# Altium PCB MotorBoard.PcbDoc (part 2 of 3)
Units mm, origin at the board's own origin, x right, y up, seen from the top; angles counter-clockwise.
Board outline 65.2 x 61.84 mm, 4 copper layers (Top Layer, Layer 1, Layer 2, Bottom Layer), stack 1.57 mm thick; 121 components, 73 nets, 432 pads, 165 vias.
Unrouted connection lines stored in the file: 1.
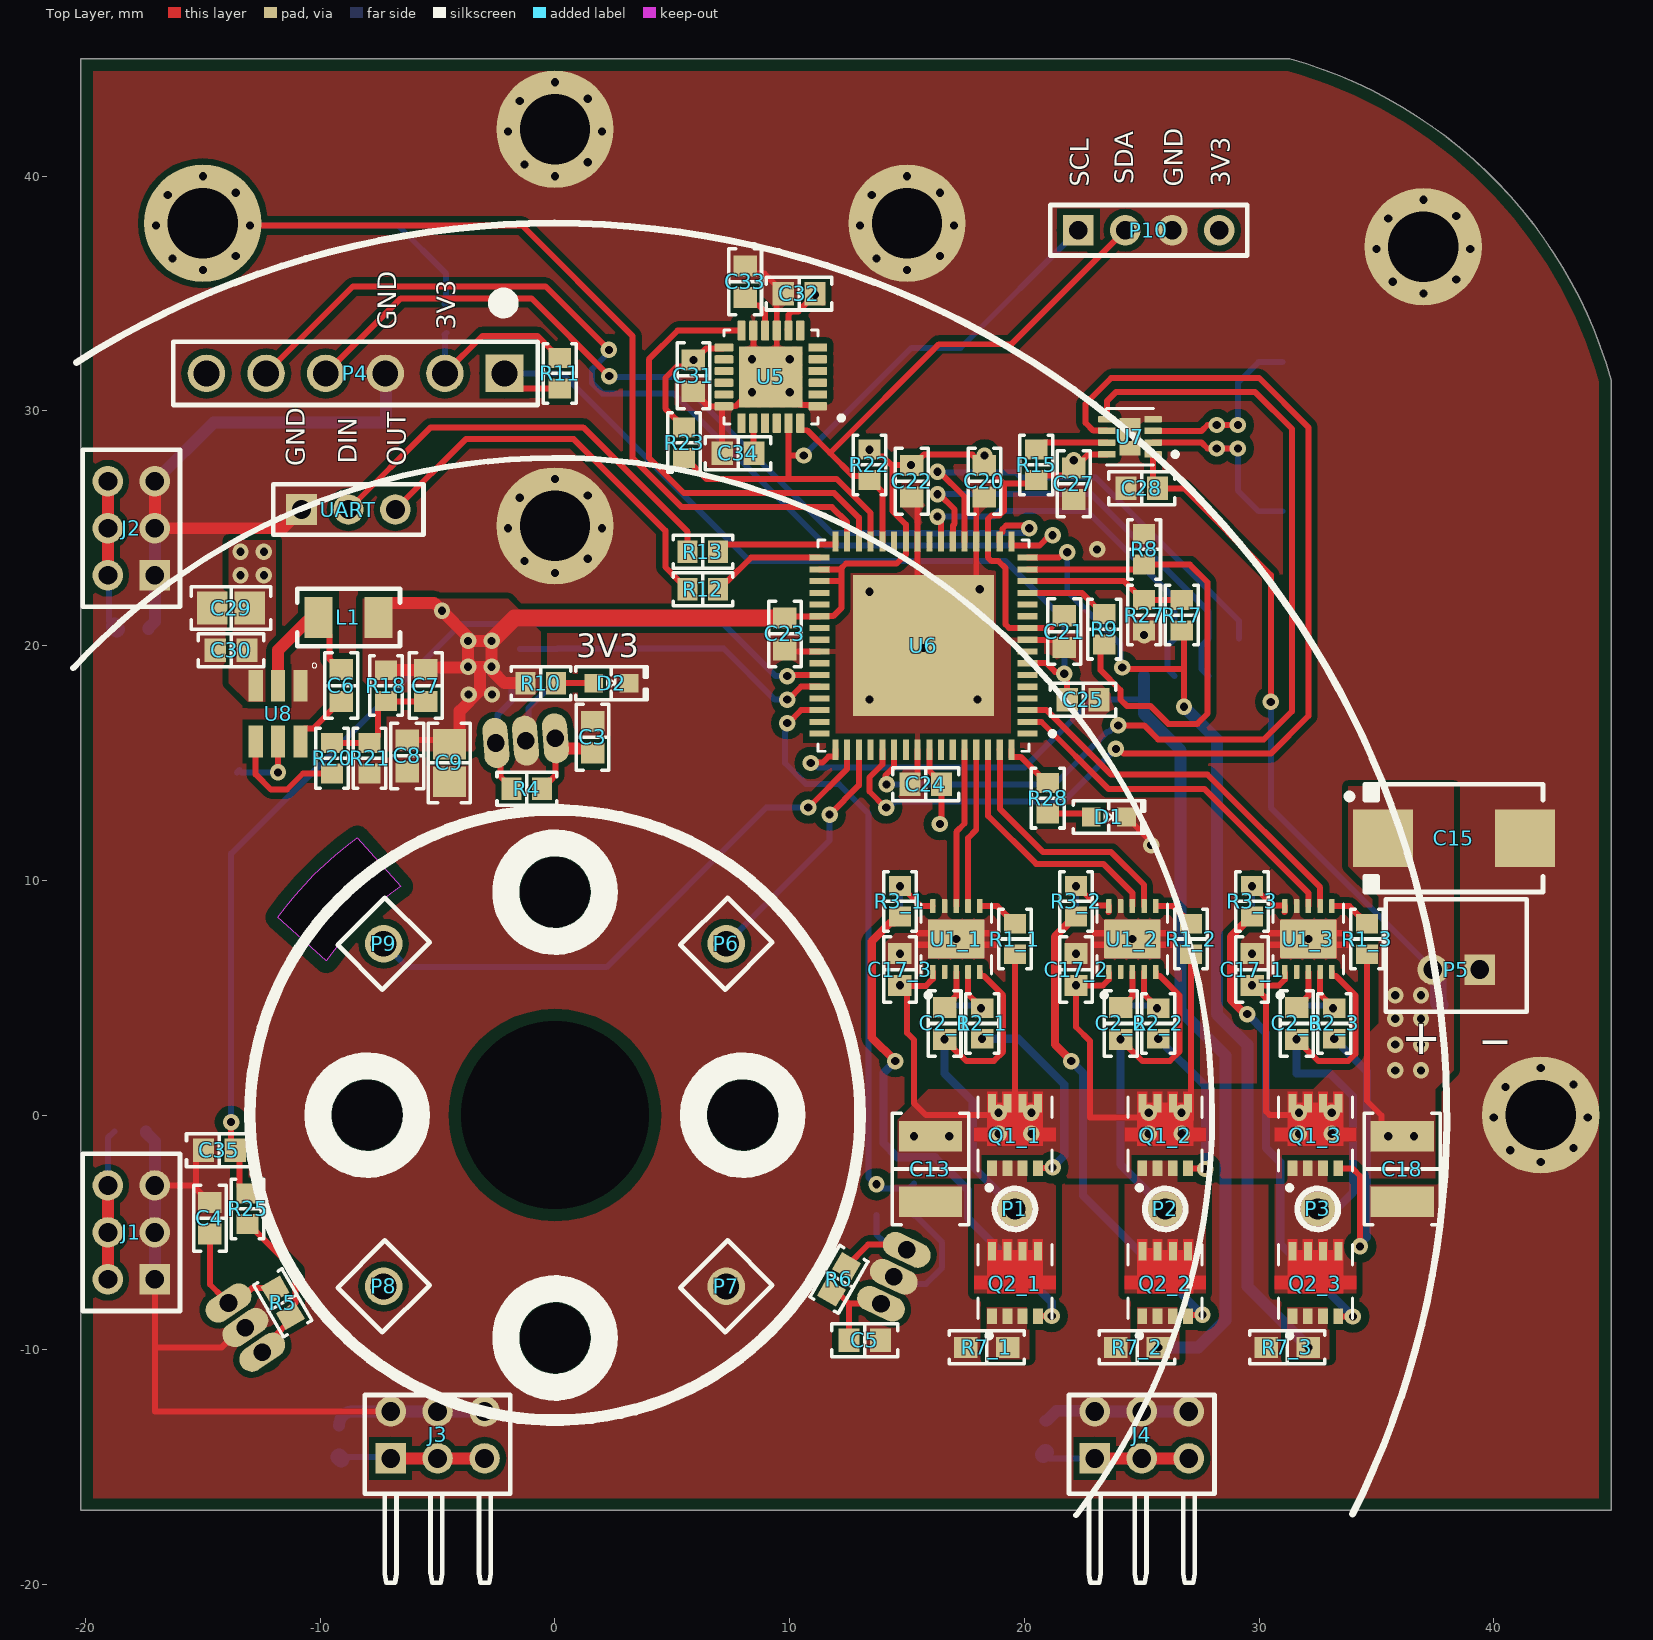
[diagram p0: Top Layer view]

## Part data (continued)
R21: library part RG1608P-133-B-T5, "RES SMD 13K OHM 0.1% 1/10W 0603", Device Package="0603 (1608 Metric)", Manufacturer=Susumu, Operating Temperature="-55°C ~ 155°C", Power (Watts)="0.1W, 1/10W", Ratings=AEC-Q200, Supplier Device Package=0603, Supplier Part Number 1=RG16P13.0KBCT-ND, Temperature Coefficient=±25ppm/°C, Tolerance=±0.1%, ComponentLink1Description=Datasheet, ComponentLink1URL=//media.digikey.com/pdf/Data%20Sheets/Susumu%20PDFs/RG_RM_RGH_Oct2012.pdf, ComponentLink2Description="DigiKey Link", ComponentLink2URL=http://digikey.com/product-detail/en/susumu/RG1608P-133-B-T5/RG16P13.0KBCT-ND/1240863, Composition="Thin Film", Features="Anti-Sulfur, Automotive AEC-Q200", Height - Seated (Max)="0.020\" (0.50mm)", LastUpdated="13-Aug-20 10:37:00 AM", Lifecycle Status=Active, Minimum Order=1, Number of Terminations=2, Package / Case="0603 (1608 Metric)", Packaging=TapeAndReel, Part Number=RG1608P-133-B-T5, Part Status=Active, PartId=12110, Price=0.06, Resistance="13 kOhms", Series=RG, Size / Dimension="0.063\" L x 0.031\" W (1.60mm x 0.80mm)", Supplier 1=DigiKey
R22 R23: library part CPF-A-0603B4K7E, "RES SMD 4.7K OHM 0.1% 1/16W 0603", Device Package="0603 (1608 Metric)", Manufacturer="TE Connectivity Passive Product", Operating Temperature="-55°C ~ 155°C", Power (Watts)="0.063W, 1/16W", Ratings=AEC-Q200, Supplier Device Package=0603, Supplier Part Number 1=A124067CT-ND, Temperature Coefficient=±25ppm/°C, Tolerance=±0.1%, ComponentLink1Description=Datasheet, ComponentLink1URL=https://www.te.com/commerce/DocumentDelivery/DDEController?Action=srchrtrv&DocNm=1773200-1&DocType=DS&DocLang=English, ComponentLink2Description="DigiKey Link", ComponentLink2URL=http://digikey.com/product-detail/en/te-connectivity-passive-product/CPF-A-0603B4K7E/A124067CT-ND/5969987, Composition="Thin Film", Features="Anti-Sulfur, Automotive AEC-Q200, Moisture Resistant", Height - Seated (Max)="0.022\" (0.55mm)", LastUpdated="13-Aug-20 10:37:07 AM", Lifecycle Status=Active, Minimum Order=1, Number of Terminations=2, Package / Case="0603 (1608 Metric)", Packaging=TapeAndReel, Part Number=CPF-A-0603B4K7E, Part Status=Active, PartId=8242, Price=0.09, Resistance="4.7 kOhms", Series="CPF-A, Neohm", Size / Dimension="0.061\" L x 0.031\" W (1.55mm x 0.80mm)", Supplier 1=DigiKey
R24 R25 R26: library part SDR03EZPJ221, "RES SMD 220 OHM 5% 0.3W 0603", Device Package="0603 (1608 Metric)", Manufacturer="Rohm Semiconductor", Operating Temperature="-55°C ~ 155°C", Power (Watts)=0.3W, Supplier Device Package=0603, Supplier Part Number 1=511-1752-1-ND, Temperature Coefficient=±200ppm/°C, Tolerance=±5%, ComponentLink1Description=Datasheet, ComponentLink1URL=https://www.rohm.com/datasheet/SDR03EZPJ/sdr-e, ComponentLink2Description="DigiKey Link", ComponentLink2URL=http://digikey.com/product-detail/en/rohm-semiconductor/SDR03EZPJ221/511-1752-1-ND/9675103, Composition="Thick Film", Features="Pulse Withstanding", Height - Seated (Max)="0.022\" (0.55mm)", LastUpdated="13-Aug-20 10:37:09 AM", Lifecycle Status=Active, Minimum Order=1, Number of Terminations=2, Package / Case="0603 (1608 Metric)", Packaging=TapeAndReel, Part Number=SDR03EZPJ221, Part Status=Active, PartId=6903, Price=0.01, Resistance="220 Ohms", Series=SDR03, Size / Dimension="0.063\" L x 0.031\" W (1.60mm x 0.80mm)", Supplier 1=DigiKey
U1_1 U1_2 U1_3: library part UCC27282DRCR, "3-A, 120-V half bridge gate driver with 5-V UVLO, interlock and enable 10-VSON -40 to 125", Package="VSON-10 Texas Instruments", Availability=Warning, DigiKey-Purchase-URL=https://snapeda.com/shop?store=DigiKey&id=3625400, MF="Texas Instruments", MP=UCC27282DRCR, Price=None, SnapEDA_Link=https://www.snapeda.com/parts/UCC27282DRCR/Texas%20Instruments/view-part/3625400/?ref=snap, Texas_Instruments-Purchase-URL=https://snapeda.com/shop?store=Texas+Instruments&id=3625400
U2 U3 U4: library part DRV5011
U6: "PIC32MK Microcontroller IC 32-Bit 120MHz 1MB _1M x 8_ FLASH 64-TQFP _10x10_", Package="TQFP-64 Microchip", Digi-Key_Part_Number=PIC32MK1024MCF064-I/PT-ND, Digi-Key_Purchase_URL=https://www.digikey.kr/product-detail/en/microchip-technology/PIC32MK1024MCF064-I-PT/PIC32MK1024MCF064-I-PT-ND/7164902?utm_source=snapeda&utm_medium=aggregator&utm_campaign=symbol, MF=Microchip, MP=PIC32MK1024MCF064-I/PT, SnapEDA_Link=https://www.snapeda.com/parts/PIC32MK1024MCF064-I/PT/Microchip/view-part/876704/?ref=snap
U7: "11-V, 1-A H-bridge motor driver 8-WSON -40 to 85", Package="WSON-8 Texas Instruments", Availability=Good, DigiKey-Purchase-URL=https://snapeda.com/shop?store=DigiKey&id=617854, MF="Texas Instruments", Mouser-Purchase-URL=https://snapeda.com/shop?store=Mouser&id=617854, MP=DRV8837CDSGR, Price=None, SnapEDA_Link=https://www.snapeda.com/parts/DRV8837CDSGR/Texas%20Instruments/view-part/617854/?ref=snap, Texas_Instruments-Purchase-URL=https://snapeda.com/shop?store=Texas+Instruments&id=617854
U8: "ADJ step down Buck"

## Free pads (board coordinates)
  round 5 hole 3 unplated: 1(-15,38) 1(0,25.1) 1(0,42) 1(15,38) 1(37,37) 1(42,0)
  round 0 hole 3 unplated: 1(-8,0) 1(0,-9.5) 1(0,9.5) 1(8,0)
  round 0 hole 8 unplated: 1(0,0)

## Via types
v1: diameter 0.7, hole 0.35, Top Layer to Bottom Layer, tented both sides, 96 vias
v2: diameter 0.7, hole 0.35, Top Layer to Bottom Layer, tented bottom, 66 vias
v3: diameter 0.7, hole 0.35, Top Layer to Bottom Layer, 3 vias